# Altium PCB Geiger.PcbDoc
Units mil, origin at the board's own origin, x right, y up, seen from the top; angles counter-clockwise.
Board outline 3195 x 2195 mil, 2 copper layers (Top Layer, Bottom Layer); 22 components, 14 nets, 62 pads, 6 vias.
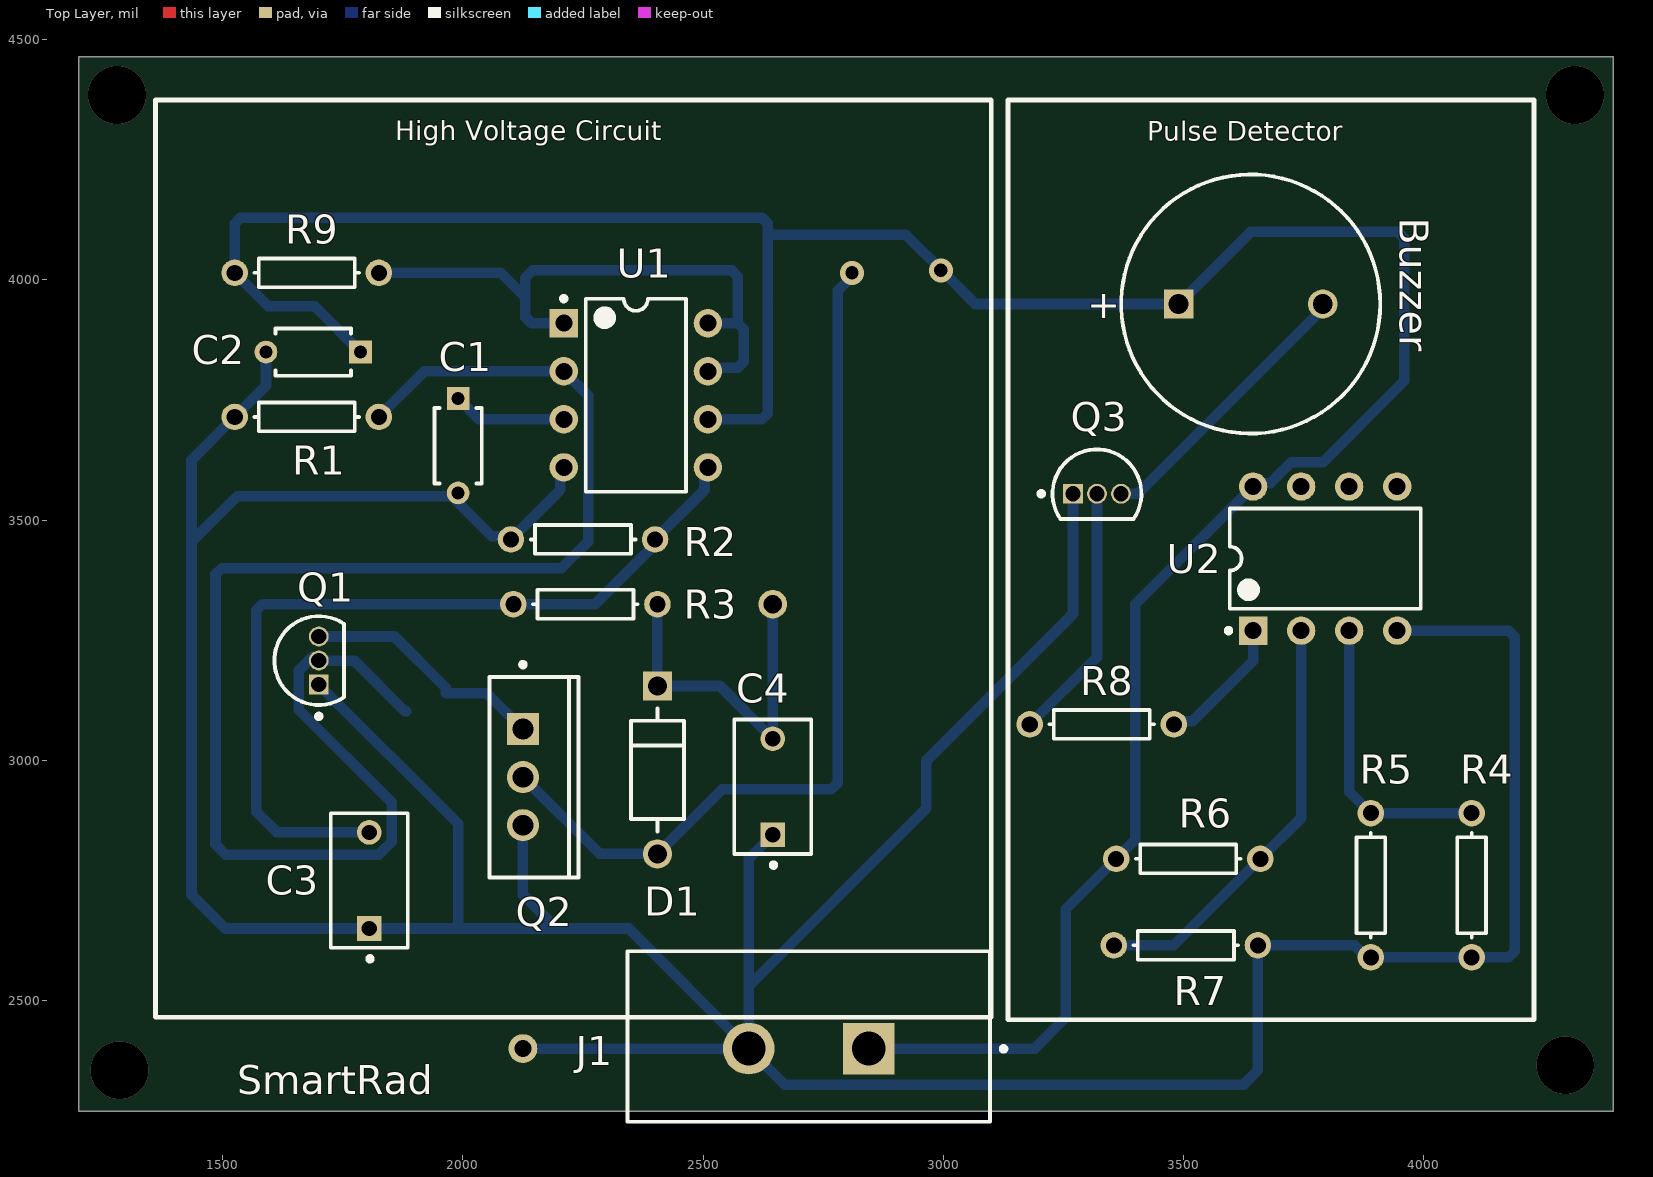
[diagram p0: Top Layer view]
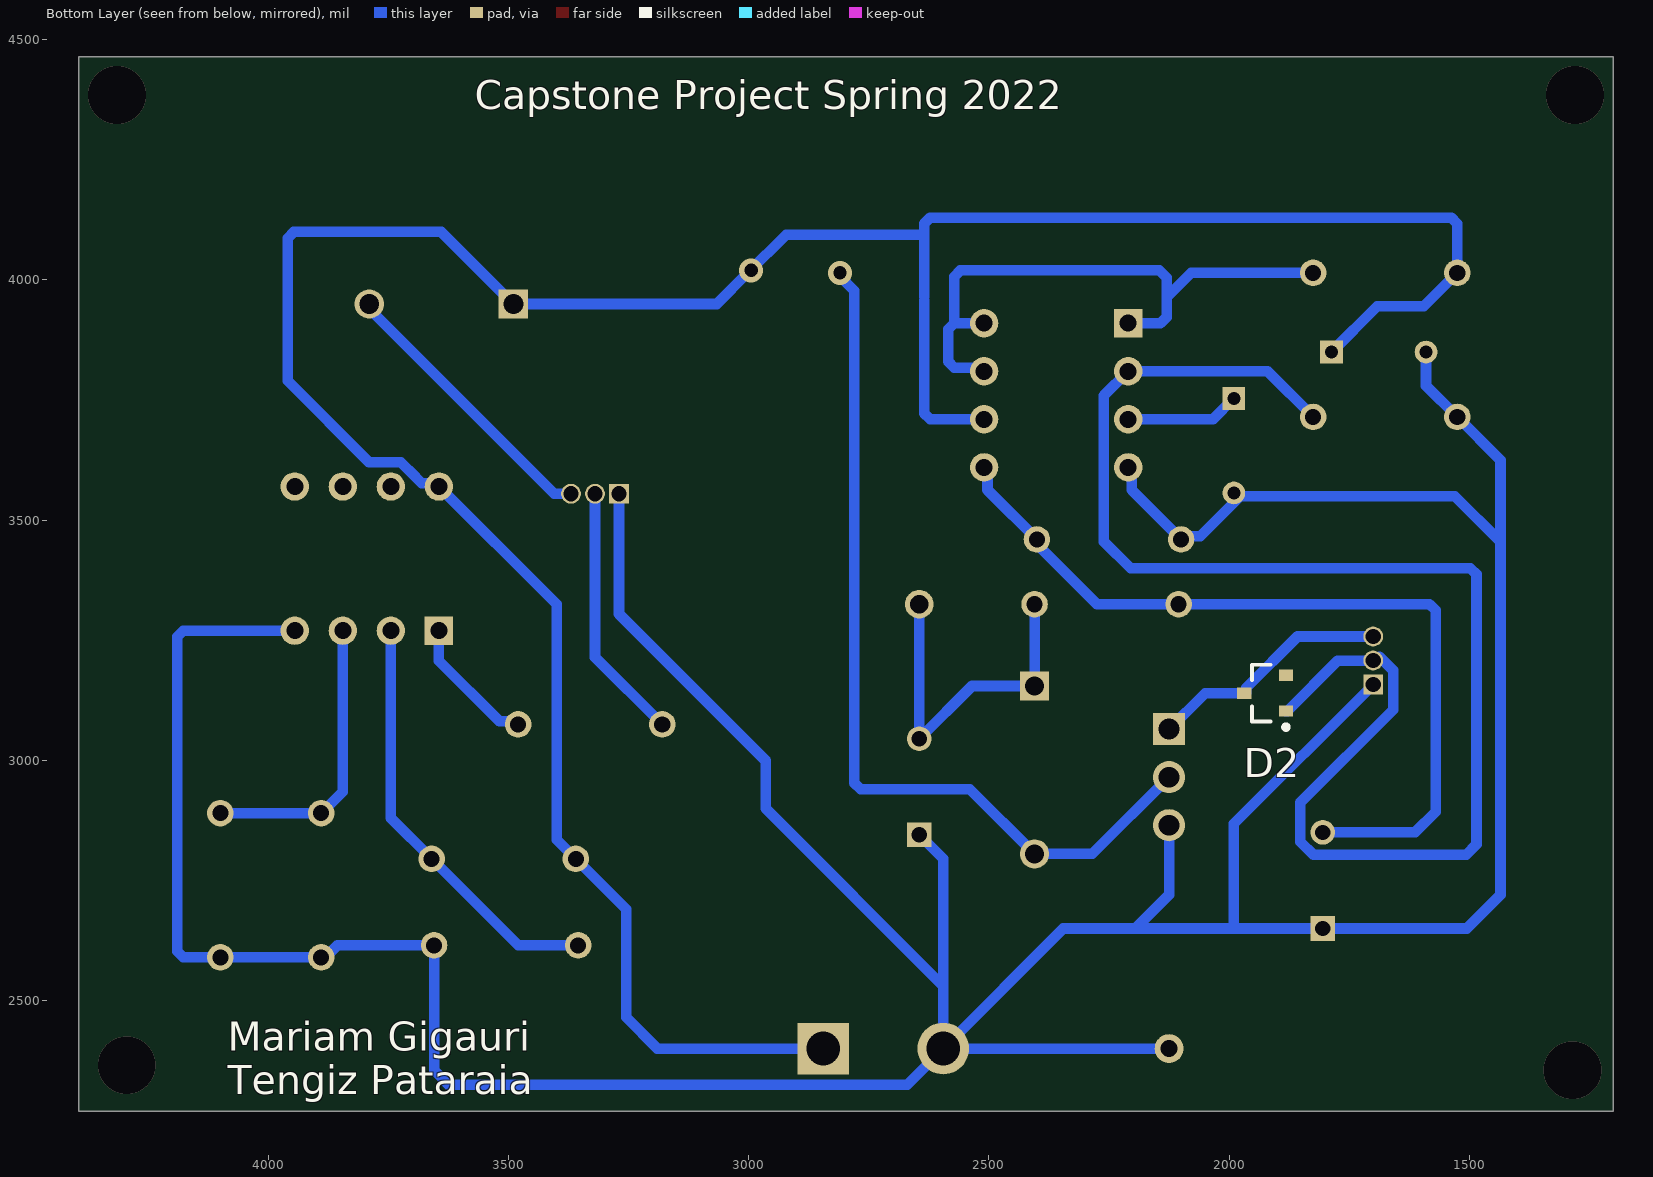
[diagram p1: Bottom Layer view, seen from below]

## Layer stack, top to bottom
Top Solder: solder mask 0.4, Solder Resist, Dk 3.5
Top Layer: signal copper 1.4
Dielectric 1: dielectric 12.6, FR-4, Dk 4.8
Bottom Layer: signal copper 1.4
Bottom Solder: solder mask 0.4, Solder Resist, Dk 3.5

## Board outline
1200,2270 1200,4465 4395,4465 4395,2270

## Design rules (kind name [scope] priority, off if disabled: settings)
Clearance [All] p1: gap=10 ignorepadtopadclearanceinfootprint=FALSE except(0: Arc-Hole Track-Hole SMDPad-Hole THPad-Hole Via-Hole Fill-Hole Poly-Hole Region-Hole Text-Hole)
PolygonConnect [All] p1: connectstyle=Relief reliefconductorwidth=10 reliefentries=4 polygonreliefangle="90 Angle" airgapwidth=10
RoutingVias [All] p1: holewidth=28 width=50 viastyle="Through Hole" minholewidth=28 minwidth=50 maxholewidth=28 maxwidth=50
SolderMaskExpansion [All] p1: expansion=4 istentingtop=FALSE
Width [All] p1: maxlimit=22 minlimit=22 preferedwidth=22 minimp=50.000000 maximp=50.000000 favimp=50.000000
30 further rules are at their usual default settings.

## Components (designator, comment, footprint, x,y, rotation, side; value= is the part's Value field where it differs from the comment)
Buzzer "KPEG242" KINGS-KPEG242-2 3640,3950 r0 top
C1 "22nF" FP-RCE1K1-2_5-MFG 1990,3655 r270 top
C2 "0.1uF" FP-RCE1K1-2_5-MFG 1688.43,3850 r180 top
C3 "0.01uF" KEMT-C330C105M5U5TA 1805,2750 r90 top
C4 "0.1uF" KEMT-C330C105M5U5TA 2645,2945 r90 top
D1 "1N4007" FP-1N4007-MFG 2405,2980 r270 top value=15pF
D2 "BAS40-04" INF-SOT23_L 1925,3140 r0 bottom
J1 "Batareika" FP-350428-1-MFG 2720,2425 r180 top
Q1 "BC516" ONSC-TO-92-3-29-11 1700,3207.78 r90 top
Q2 "IRF840" VISH-TO-220AB-3 2125,2965 r0 top
Q3 "MPS2222A" ONSC-TO-92-3-29-11 3320,3555 r0 top
R1 "Res1" AXIAL-0.3 1675,3715 r0 top value=10K
R2 "Res1" AXIAL-0.3 2250,3460 r0 top value=30.1K
R3 "Res1" AXIAL-0.3 2255,3325 r0 top value=10M
R4 "Res1" AXIAL-0.3 4100,2740 r90 top value=1K
R5 "Res1" AXIAL-0.3 3890,2740 r90 top value=40K
R6 "Res1" AXIAL-0.3 3510,2795 r0 top value=2K
R7 "Res1" AXIAL-0.3 3505,2615 r0 top value=1K
R8 "Res1" AXIAL-0.3 3330,3075 r180 top value=10K
R9 "Res1" AXIAL-0.3 1675,4015 r0 top value=22.1
U1 "MC34063AP" P0008A 2360,3760 r0 top
U2 "LM358N" ONSC-PDIP-8-626-05_M 3795,3420 r90 top

## Footprints (in the part's own frame and the unit in brackets; to place one, negate y for a bottom-side part, rotate by r counter-clockwise, add the part's x,y. Pads: shape width x height; smd on the part's side, far side on the other; paste and mask are expansions set on the pad)
AXIAL-0.3 [mm] "Axial Device, Thru-Hole; 2 Leads; 0.3 in Pin Spacing"
  round 1.4 hole 0.85: 1(-3.81,0) 2(3.81,0)
  silkscreen extent -2.77,-0.76 2.77,0.76
FP-1N4007-MFG [mm]
  rect 1.55x1.55 hole 1 paste-1000 mask+0: 1(-4.44,0)
  round 1.55 hole 1 paste-1000 mask+0: 2(4.44,0)
  silkscreen extent -3.26,-1.4 3.26,1.4, body extent -5.32,-1.5 5.32,1.5, height 0.25
FP-350428-1-MFG [mm]
  rect 2.73x2.73 hole 1.78 paste-1000 mask+0: 1(-3.175,0.635)
  round 2.73 hole 1.78 paste-1000 mask+0: 2(3.175,0.635)
  silkscreen extent -10.43,-4.51 9.59,4.51, body extent -9.69,-4.61 9.69,4.61, height 0.25
FP-RCE1K1-2_5-MFG [mm]
  rect 1.2x1.2 hole 0.7 paste-1000 mask+0: 1(-2.5,0)
  round 1.2 hole 0.7 paste-1000 mask+0: 2(2.5,0)
  silkscreen extent -2,-1.25 2,1.25, body extent -3.2,-1.35 3.2,1.35, height 0.25
INF-SOT23_L [mm] "SOT23, 3-Leads, Body 2.9x1.3 mm, Pitch 0.95 mm, IPC High Density"
  rect 0.75x0.6 smd: 1(-1.1,0.95) 2(-1.1,-0.95) 3(1.1,0)
  silkscreen extent -1.22,-1.5 0.7,1.92, body extent -0.7,-1.5 0.7,1.5, height 1.1
KEMT-C330C105M5U5TA [mm] "THD, 2-Leads, Body 7.11x4.07mm"
  rect 1.3x1.3 hole 0.8: 1(-2.54,0)
  round 1.3 hole 0.8: 2(2.54,0)
  silkscreen extent -4.27,-2.03 3.55,2.03, body extent -3.55,-2.03 3.55,2.03, height 9.14
KINGS-KPEG242-2 [mm] "THD, 2-Leads, Dia 13.7mm, Pitch 7.62mm"
  rect 1.55x1.55 hole 1.05: 1(-3.81,0)
  round 1.55 hole 1.05: 2(3.81,0)
  silkscreen extent -6.85,-6.85 6.85,6.85, body extent -6.85,-6.85 6.85,6.85, height 7.6
ONSC-PDIP-8-626-05_M [mm] "DIP, 8-Leads, Body 10x7.1mm, Pitch 2.54mm"
  rect 1.5x1.5 hole 0.9: 1(-3.81,3.81)
  round 1.5 hole 0.9: 2(-3.81,1.27) 3(-3.81,-1.27) 4(-3.81,-3.81) 5(3.81,-3.81) 6(3.81,-1.27) 7(3.81,1.27) 8(3.81,3.81)
  silkscreen extent -3.93,-5.05 2.65,5.23, body extent -3.95,-5 3.95,5, height 5.33
ONSC-TO-92-3-29-11 [mm] "TO, 3-Leads, Body Dia 4.7mm, Pitch 1.27mm"
  rect 1.05x1.05 hole 0.8: 1(-1.27,0)
  round 1.05 hole 0.8: 2(0,0) 3(1.27,0)
  silkscreen extent -3.07,-1.34 2.35,2.35, body extent -2.35,-1.33 2.36,2.36, height 7.87
P0008A [mm] "DIP, 8-Leads, Body 10.15x6.6mm, Pitch 2.54mm"
  rect 1.5x1.5 hole 0.9: 1(-3.81,3.81)
  round 1.5 hole 0.9: 2(-3.81,1.27) 3(-3.81,-1.27) 4(-3.81,-3.81) 5(3.81,-3.81) 6(3.81,-1.27) 7(3.81,1.27) 8(3.81,3.81)
  silkscreen extent -3.93,-5.1 2.65,5.23, body extent -3.95,-5.07 3.95,5.07, height 5.08
VISH-TO-220AB-3 [mm] "FM, 3-Leads, Body 10.55x4.65mm, Pitch 2.54mm"
  rect 1.7x1.7 hole 1.1: 1(0,2.54)
  round 1.7 hole 1.1: 2(0,0) 3(0,-2.54)
  silkscreen extent -1.77,-5.3 2.94,6.07, body extent -1.74,-5.28 2.91,5.28, height 19.31

## Part data
Buzzer: library part CMP-2000-06518-1, "Piezo Indicator, 4100 Hz, 3 to 16 V, -20 to 70 degC, 2-Pin THD, RoHS", Current - Max=7A, Frequency Range=3600to4600Hz, Manufacturer=KingstateElectronicsCorp., Maximum Resonant Frequency=4600Hz, Maximum Supply Current=7mA, Operating Temperature=-20to70°C, Package Description="2-Pin Through Hole Device, Body Dia 13.7 mm, Pitch 7.62 mm", PartNumber=KPE-242, Typical Operating Supply Voltage=12Vdc, Category=AudioIndicatorsandAlerts, Datasheet URL=https://datasheet.ciiva.com/11776/0900766b8068f3a2-11776713.pdf, Datasheet Version=01/2006, Manufacturer URL=http://www.kingstate.com.tw/index.php/en/, Minimum Sound Pressure=70dBA, Mounting=ThroughHole, Mounting Technology=ThroughHole, Package Reference=KPEG242, Product Diameter=13.7mm, Product Height=7.6mm, Technology=Piezo, Termination Method=Pin, Tone Mode=Continuous, Type=Indicator
C1: library part CMP-06035-035148-1, "Cap Ceramic Monolithic 22nF 50V 5% Thru-Hole Bulk", Case/Package=Radial, Dielectric=C0G, Max Operating Temperature=125°C, Min Operating Temperature=-55°C, Package Quantity=500, Ratings=AEC-Q200, Resistor Type=Ceramic, Tolerance=5%, Voltage Rating=50V, Capacitance=22nF, Height=3.5mm, Height - Seated (Max)=0.138inch, Lead Diameter=0.5mm, Lead Pitch=0.197inch, Lead/Base Style="Formed Leads", Length=0.157inch, Mount="Through Hole", Packaging=Bulk, Termination=Radial, Voltage Rating (DC)=50V, Width=0.098inch
C2: library part CMP-06035-035148-1, "Cap Ceramic Monolithic 22nF 50V 5% Thru-Hole Bulk", Capacitance=22nF, Case/Package=Radial, Dielectric=C0G, Max Operating Temperature=125°C, Min Operating Temperature=-55°C, Package Quantity=500, Ratings=AEC-Q200, Resistor Type=Ceramic, Tolerance=5%, Voltage Rating=50V, Height=3.5mm, Height - Seated (Max)=0.138inch, Lead Diameter=0.5mm, Lead Pitch=0.197inch, Lead/Base Style="Formed Leads", Length=0.157inch, Mount="Through Hole", Packaging=Bulk, Termination=Radial, Voltage Rating (DC)=50V, Width=0.098inch
C3 C4: library part CMP-2000-06056-1, "Ceramic Capacitor, 1 uF, +/- 20%, 50 V, -10 to 85 degC, 2-Pin THD, RoHS, Bulk", Capacitance=1µF, Manufacturer=Kemet, Operating Temperature=10°C~85°C, Package / Case=Radial, Package Description="2-Pin Through Hole Device, Body 7.11 x 4.07 mm", Package Reference=C330C105M5U5TA, Ratings=-, Standard Package=250, Temperature Coefficient=Z5U, Tolerance=±20%, Voltage - Rated=50V, Applications=GeneralPurpose, Catalog Drawings=C330(std), Category=Capacitors, Datasheet URL=http://www.kemet.com/Lists/ProductCatalog/Attachments/599/KEM_C1051_GOLDMAX_Z5U.pdf, Datasheet Version=12/2015, Family=CeramicCapacitors, Features=-, Height - Seated (Max)="0.360\"(9.14mm)", Lead Spacing="0.200\"(5.08mm)", Lead Style=Straight, Manufacturer URL=http://www.kemet.com/, Mounting Technology=ThroughHole, Mounting Type=ThroughHole, Online Catalog=GoldenMax™Series, Other Names=399-4390, Packaging=Bulk, PCN Design/Specification=C3yySeriesGoldenMaxLeadConfiguration02/Feb/2015, Product Training Modules=CapacitorBasics-TypicalUsesforCapacitors, Series=GoldenMax™, Size / Dimension="0.300\"Lx0.150\"W(7.62mmx3.81mm)", Thickness (Max)=-
D1: library part CMP-123542-000001-1, "Rectifier diode 1000 V 1 A DO-41, ,", Capacitance=15pF, Forward Current=1A, Manufacturer=Diotec, Max Junction Temp=+175°C, Max Repetitive Reverse Voltage=1000V, Max Surge Forward Current=27A, Peak Reverse Current=5uA, Temperature="-50°C to +175°C", Temperature Range Low=-50°C, Automotive=No, Category=Diode, ComponentLink2Description=Datasheet, ComponentLink2URL=https://datasheet.octopart.com/1N4007-Diotec-datasheet-62346875.pdf, Device Class L1="Discrete Semiconductors", Device Class L2=Diodes, Device Class L3="Rectifier Diodes", Height=2.8mm, Ipc Land Pattern Name=DIOAD888W100L520D280, Lead Free=Yes, Manufacturer Part Number=1N4007, Octopart=https://octopart.com/1n4007-diotec-4040411, Package=1N4007, Reverse Voltage=1000V, RoHS=TRUE, Temperature Range High=+175°C
D2: library part CMP-1182-00024-1, "Silicon Schottky Diode, -55 to 150 degC, SOT23, Reel, Green", Manufacturer=Infineon, ComponentLink1Description="Manufacturer URL", ComponentLink1URL=http://www.infineon.com/, ComponentLink2Description=Datasheet, ComponentLink2URL=http://www.infineon.com/dgdl/bas40_bas140series.pdf?folderId=db3a30431400ef68011425f1ca2505e3&fileId=db3a304314dca389011518a57ed20e11, ComponentLink3Description="Package Specification", ComponentLink3URL=http://www.infineon.com/dgdl/SOT23-Package_Overview.pdf?folderId=db3a30431936bc4b0119532290053c66&fileId=db3a30431936bc4b0119533468123c85, Configuration=Dual, CT (max)="5Â pF", Green=TRUE, IF (max)="120Â mA", Mounting Technology="Surface Mount", PackageDescription="3-Pin Small Outline Transistor Package, 1.3 x 2.9 mm Body, 0.95 mm Pitch", PackageReference=SOT23, PackageVersion=Apr-08, Packing=Reel, PartNumber=BAS40-04, VF (max)="1,000Â mV", VR (max)="40Â V"
J1: library part CMP-03369-000080-1, "CONN HEADER VERT 2POS 6.35MM", Current Rating=12A, Manufacturer="TE Connectivity", Manufacturer Part Number=350428-1, Temperature="-40°C to +105°C", Temperature Range High=+105°C, Temperature Range Low=-40°C, Voltage Rating=600V, Automotive=No, Category=Conn, ComponentLink2Description=Datasheet, ComponentLink2URL=https://www.te.com/commerce/DocumentDelivery/DDEController?Action=showdoc&DocId=Customer+Drawing%7F350428%7FY2%7Fpdf%7FEnglish%7FENG_CD_350428_Y2.pdf%7F350428-1, Conn Gender=Male, Conn Orientation=Vertical, Contact Material=Gold,Nickel, Device Class L1=Connectors, Device Class L2="Headers and Wire Housings", Device Class L3=unset, Digikey Description="CONN HEADER VERT 2POS 6.35MM", Height=14.99mm, Lead Free=Yes, Mouser Description="Connector, Soft Shell; Universal MATE-N-LOK; 2; Nylon; Natural; 19 A; 600 VAC", Number Of Contacts=2, Number Of Rows=1, Octopart=https://octopart.com/350428-1-te+connectivity-46505355, Package=350428-1, Pitch=6.35mm, RoHS=TRUE, Standoff Height=0.63mm
Q1: library part CMP-1048-01441-1, "Amplifier Transistor, PNP Silicon, 3-Pin TO-92, Pb-Free, Bulk Box", Manufacturer="On Semiconductor", PartNumber=BC557CG, ComponentLink1Description="Manufacturer URL", ComponentLink1URL=http://www.onsemi.com/, ComponentLink2Description=Datasheet, ComponentLink2URL=http://www.onsemi.com/pub_link/Collateral/BC556B-D.PDF, ComponentLink3Description="Package Specification", ComponentLink3URL=http://www.onsemi.cn/pub_link/Collateral/2N6426-D.PDF, DatasheetVersion="Rev. 3", IC Continuous (A)=-0.1, Mounting Technology="Through Hole", PackageDescription="3-Pin Transistor Outline, Body 4.825 x 3.685 mm, Pitch 1.27 mm", PackageReference=TO-92-3-29-11_AM_SL, PackageVersion="Rev. AM", Packing="Bulk Box", Polarity=PNP, RoHS=TRUE
Q2: library part CMP-2000-06467-1, "Power MOSFET, 500 V, -55 to 150 degC, 3-Pin FM, RoHS, Tape and Reel", Manufacturer=Vishay, Maximum Continuous Drain Current=8A, Maximum Drain Source Resistance=0.85Ω, Maximum Drain Source Voltage=500V, Maximum Gate Source Voltage=±20V, Maximum Operating Temperature=+150°C, Maximum Power Dissipation=125W, Minimum Gate Threshold Voltage=2V, Minimum Operating Temperature=-55°C, Package Description="3-Pin Flange Mount, Body 10.275 x 4.45 mm, Pitch 2.54 mm", Package Reference=TO-220AB-3, Package Type=TO-220AB, Typical Input Capacitance @ Vds=1300pF@25V, Category=PowerMOSFET, Channel Mode=Enhancement, Channel Type=N, Datasheet URL=https://datasheet.ciiva.com/26791/irf840pbf-26791500.pdf, Datasheet Version="Rev. C, 03/2011", Dimensions=10.41x4.7x9.01mm, Height=9.01mm, Length=10.41mm, Manufacturer URL=http://www.vishay.com/, Mounting Technology=ThroughHole, Mounting Type=ThroughHole, Number of Elements per Chip=1, Package URL=http://www.vishay.com/docs/71195/to220ab.pdf, Pin Count=3, Typical Gate Charge @ Vgs=63nC@10V, Typical Turn-Off Delay Time=49ns, Typical Turn-On Delay Time=14ns, Width=4.7mm
Q3: library part CMP-1048-01424-1, "General Purpose Transistor, NPN Silicon, 3-Pin TO-92, Bulk Box", Manufacturer="On Semiconductor", ComponentLink1Description="Manufacturer URL", ComponentLink1URL=http://www.onsemi.com/, ComponentLink2Description=Datasheet, ComponentLink2URL=http://www.onsemi.cn/pub_link/Collateral/MPS2222-D.PDF, ComponentLink3Description="Package Specification", ComponentLink3URL=http://www.onsemi.cn/pub_link/Collateral/2N6426-D.PDF, DatasheetVersion="Rev. 3", fT Min (MHz)=300, IC Continuous (A)=0.6, Mounting Technology="Through Hole", Note1=0, PackageDescription="3-Pin Transistor Outline, Body 4.825 x 3.685 mm, Pitch 1.27 mm", PackageReference=TO-92-3-29-11_AM_SL, PackageVersion="Rev. AM", Packing="Bulk Box", PartNumber=MPS2222A, Polarity=NPN, RoHS=FALSE
R1 R2 R3 R4 R5 R6 R7 R8 R9: "Resistor", LatestRevisionDate=17-Jul-2002, LatestRevisionNote="Re-released for DXP Platform.", PackageDescription="Axial Device, Thru-Hole; 2 Leads; 0.3 in Pin Spacing", PackageReference=AXIAL-0.3, Published=8-Jun-2000, Publisher="Altium Limited"
U1: library part CMP-0323-00037-3, "Buck Inverting Buck-Boost Regulator with 3 to 40 V Input and 1.55 to 40 V Output, 0 to 70 degC, 8-Pin PDIP (P), Pb-Free (RoHS)", Manufacturer="Texas Instruments", Rating=Catalog, Switch Current Limit(Typ)(A)=1.5, Code_JEDEC=MS-001-BA, ComponentLink1Description=Datasheet, ComponentLink1URL=http://www.ti.com/general/docs/lit/getliterature.tsp?genericPartNumber=MC34063A&fileType=pdf, ComponentLink2Description="Package Specification", ComponentLink2URL=http://www.ti.com/lit/ml/mpdi001b/mpdi001b.pdf, ComponentLink3Description="URL Link1", ComponentLink3URL="Samples URL:http://www.ti.com/product/mc34063a#samples", DatasheetVersion=SLLS636M, Duty Cycle(Max)(%)=90, Eco-Plan="Pb-Free (RoHS)", Iout(Max)(A)=0.75, Iq(Typ)(mA)=4, Mounting Technology="Through Hole", PackageDescription="8-Pin Plastic Dual-In-Line Package, Row Spacing 7.62 mm, Pitch 2.54 mm", PackageReference=P0008A, PackageVersion="revE, Apr-2010", PartNumber=MC34063AP, Regulated Outputs(#)=1, SubFamily="Inverting Regulator", Topology="Buck, Inverting Buck-Boost", Vin(Max)(V)=40, Vin(Min)(V)=3, Vout(Max)(V)=40, Vout(Min)(V)=1.55
U2: library part CMP-1310-00098-1, "Single Supply Dual Operational Amplifier, 3 to 32 V, 0 to 70 degC, 8-Pin PDIP, Tube", Manufacturer="On Semiconductor", ComponentLink1Description="Manufacturer URL", ComponentLink1URL=http://www.onsemi.com/, ComponentLink2Description=Datasheet, ComponentLink2URL=http://www.onsemi.cn/pub_link/Collateral/LM358-D.PDF, ComponentLink3Description="Package Specification", ComponentLink3URL=http://www.onsemi.com/pub_link/Collateral/LM211-D.PDF, DatasheetVersion="Rev. 27", Mounting Technology="Through Hole", PackageDescription="8-Pin Plastic Dual-In Line Package, Body 9.52 x 6.605 mm, Pitch 2.54 mm", PackageReference=PDIP-8-626-05, PackageVersion="Rev. M, 04/2010", Packing=Tube, PartNumber=LM358N, RoHS=FALSE, VCC Max (V)=32, VCC Min (V)=3

## Free pads (board coordinates)
  round 60 hole 39.37: GM+(2645,3325)
  round 60 hole 35.43: GM-(2125,2400)

## Via types
v1: diameter 120, hole 120, Top Layer to Bottom Layer, 4 vias
v2: diameter 50, hole 28, Top Layer to Bottom Layer, 2 vias

## Nets (pads, with @x,y where several pads share a name; then routed paths per layer and width w, separated by ;. In a path a pad name is that pad's centre, name@x,y a point inside that pad or via, vN(x,y) a via of type N, cw(c..) or ccw(c..) an arc to the next point about the centre after c; other vN are vias at no path point)
buz: Buzzer.2 Q3.3 | length 589.5
  Bottom Layer w22: Q3.3 3405,3555 3790,3940 Buzzer.2
"Current plus": Buzzer.1 C2.1 J1.1 R6.1 R9.1 U1.6 U2.8 | length 5929.9
  Bottom Layer w22: C2.1 1691.85,3945 1595,3945 R9.1 1525,4117.11 1537.89,4130 2622.11,4130 2635,4117.11 2635,4094.57 2635,3966.27 ; U1.6 2538.51,3710 2622.11,3710 2635,3722.89 2635,3957.54 ; 2635,4090 2639.57,4094.57 2922.28,4094.57 3001.85,4015 3066.85,3950 Buzzer.1 3640,4100 3947.11,4100 3960,4087.11 3960,3790 3790.53,3620.53 3724.07,3620.53 3694.47,3590.93 3694.47,3590.73 3680.83,3577.09 3652.09,3577.09 3400,3325 3400,2835 R6.1 3255,2690 3255,2465 3190,2400 J1.1
  other v2: 2995,4020
Final: C4.2 D1.1 pad.GM+ R3.2 | length 735.7
  Bottom Layer w22: R3.2 D1.1 2535.2,3154.8 C4.2 pad.GM+
GND: C1.2 C2.2 C3.1 C4.1 J1.2 pad.GM- Q1.1 Q2.3 Q3.1 R1.1 R2.1 R4.1 R5.1 R7.2 U1.4 U2.4 | length 9354.9
  Bottom Layer w22: C2.2 1590,3780 R1.1 1435,3625 1435,3455 ; Q1.1 1990,2867.78 1990,2650 ; pad.GM- J1.2 ; Q2.3 2125,2720 2195,2650 ; U1.4 2202.91,3602.91 2202.91,3562.91 R2.1 2093.66,3466.34 2060.24,3466.34 1976.57,3550 1530,3550 1435,3455 ; C4.1 2595,2795 2595,2530 ; Q3.1 3270,3304.75 2965,2999.75 2965,2900 2595,2530 ; U2.4 4177.11,3270 4190,3257.11 4190,2602.89 4177.11,2590 R4.1 R5.1 3881.04,2590 3856.04,2615 R7.2 3655,2355 3625,2325 2670,2325 J1.2 ; 1435,3455 1435,2720 1505,2650 C3.1 1990,2650 ; 1990,2650 2195,2650 ; 2195,2650 2345,2650 J1.2 ; J1.2 2595,2530
minus: R6.2 R7.1 U2.2 | length 889.8
  Bottom Layer w22: R7.1 3480,2615 R6.2 3745,2880 U2.2
NetC3_2: C3.2 R2.2 R3.1 U1.5 | length 1764.9
  Bottom Layer w22: C3.2 1612.89,2850 1570,2892.89 1570,3312.11 1582.89,3325 R3.1@2105.25,3325 ; R3.1 2275,3325 2393.66,3443.66 2393.66,3453.66 2502.91,3562.91 2502.91,3602.91 U1.5
NetD1_2: D1.2 Q2.2 | length 1856.9
  Bottom Layer w22: Q2.2 2284.8,2805.2 D1.2 2539.8,2940 2767.11,2940 2780,2952.89 2780,3977.42 2810,4007.42 v2(2810,4015)
NetD2_3: D2.3 Q1.3 Q2.1 | length 510.7
  Bottom Layer w22: Q1.3 1857.59,3257.78 1964.54,3150.82 1964.54,3140.81 1965.35,3140 D2.3 2050,3140 Q2.1
NetQ3_2: Q3.2 R8.2 | length 538
  Bottom Layer w22: R8.2 3320,3215 Q3.2
"Out Pulses": R8.1 U2.1 | length 282.4
  Bottom Layer w22: R8.1 3486.34,3081.34 3518.86,3081.34 3645,3207.47 U2.1
plus: R4.2 R5.2 U2.3 | length 608.6
  Bottom Layer w22: U2.3 3845,2935 R5.2 R4.2
SWC: R9.2 U1.1 U1.7 U1.8 | length 1275
  Bottom Layer w22: R9.2 2078.94,4015 2130,3963.94 ; U1.1 2142.89,3910 2130,3922.89 2130,3963.94 ; U1.7 2517.09,3817.09 2571.84,3817.09 2585,3830.25 2585,3897.11 2572.11,3910 ; U1.8 2572.11,3910 ; 2130,3963.94 2130,4005 2145,4020 2559.23,4020 2572.11,4007.11 2572.11,3910
SWE: D2.1 Q1.2 R1.2 U1.2 | length 3255.3
  Bottom Layer w22: Q1.2@1687.29,3216.11 1658.33,3187.14 1658.33,3105.55 1851.59,2912.29 1851.59,2830.7 1824.3,2803.41 1506.59,2803.41 1485,2825 1485,3387.11 1497.89,3400 2205,3400 2260.53,3455.53 2260.53,3759.47 U1.2 1920,3810 R1.2 ; Q1.2 1773.56,3207.78 1878.74,3102.6 D2.1
"Timing Cap": C1.1 U1.3 | length 238
  Bottom Layer w22: C1.1 2033.43,3710 U1.3
pads on no net: D2.2 U2.5 U2.6 U2.7
copper on no net:
  other v1: 1285,2355 4295,2365 1280,4385 4315,4385

## Silkscreen, mask and mechanical layers (free items; w line width, h text height)
Top Overlay:
  lines w10: 1360,2465 3100,2465 3100,4375 1360,4375 1360,2465 ; 3135,2460 4230,2460 4230,4375 3135,4375 3135,2460
  text "High Voltage Circuit" at 1859.25,4291.36 h40
  text "Pulse Detector" at 3425,4290 h40
  text "SmartRad" at 1530,2305 h60
Bottom Overlay:
  text "Capstone Project Spring 2022" at 3570,4354.99 h60
  text "Mariam Gigauri / Tengiz Pataraia" at 4085,2305 h60
Mechanical 1:
  the board outline again, w10

## Text inside footprints (layer, text, board x,y; h text height)
Buzzer: Top Overlay "+" at 3300,3920 h60